# Altium PCB COND.PcbDoc
Units mil, origin at the board's own origin, x right, y up, seen from the top; angles counter-clockwise.
Board outline 1299.21 x 3180.91 mil, 2 copper layers (Top Layer, Bottom Layer), stack 12.8 mil thick; 123 components, 74 nets, 370 pads, 114 vias.
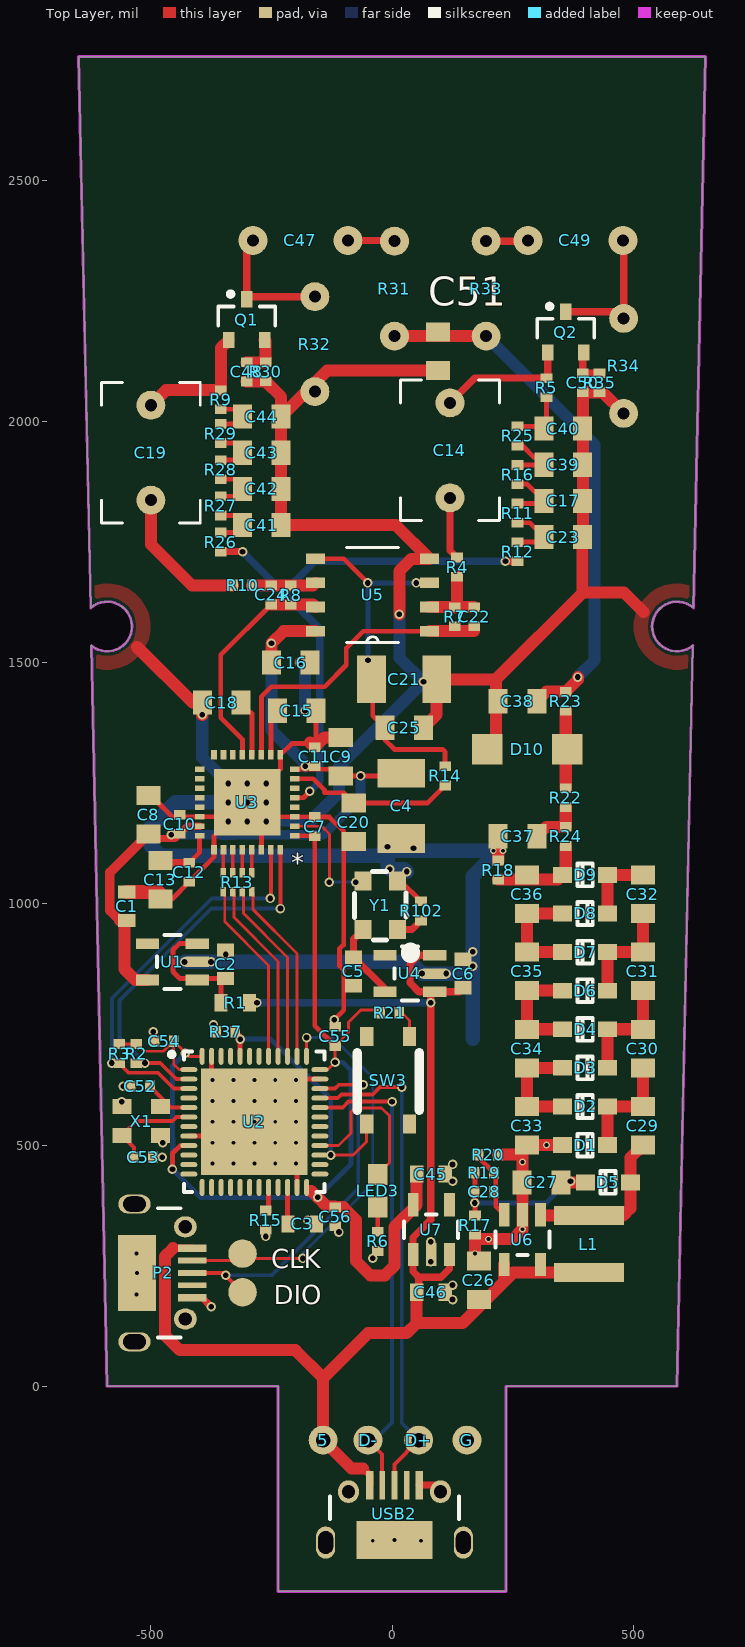
[diagram p0: Top Layer view]
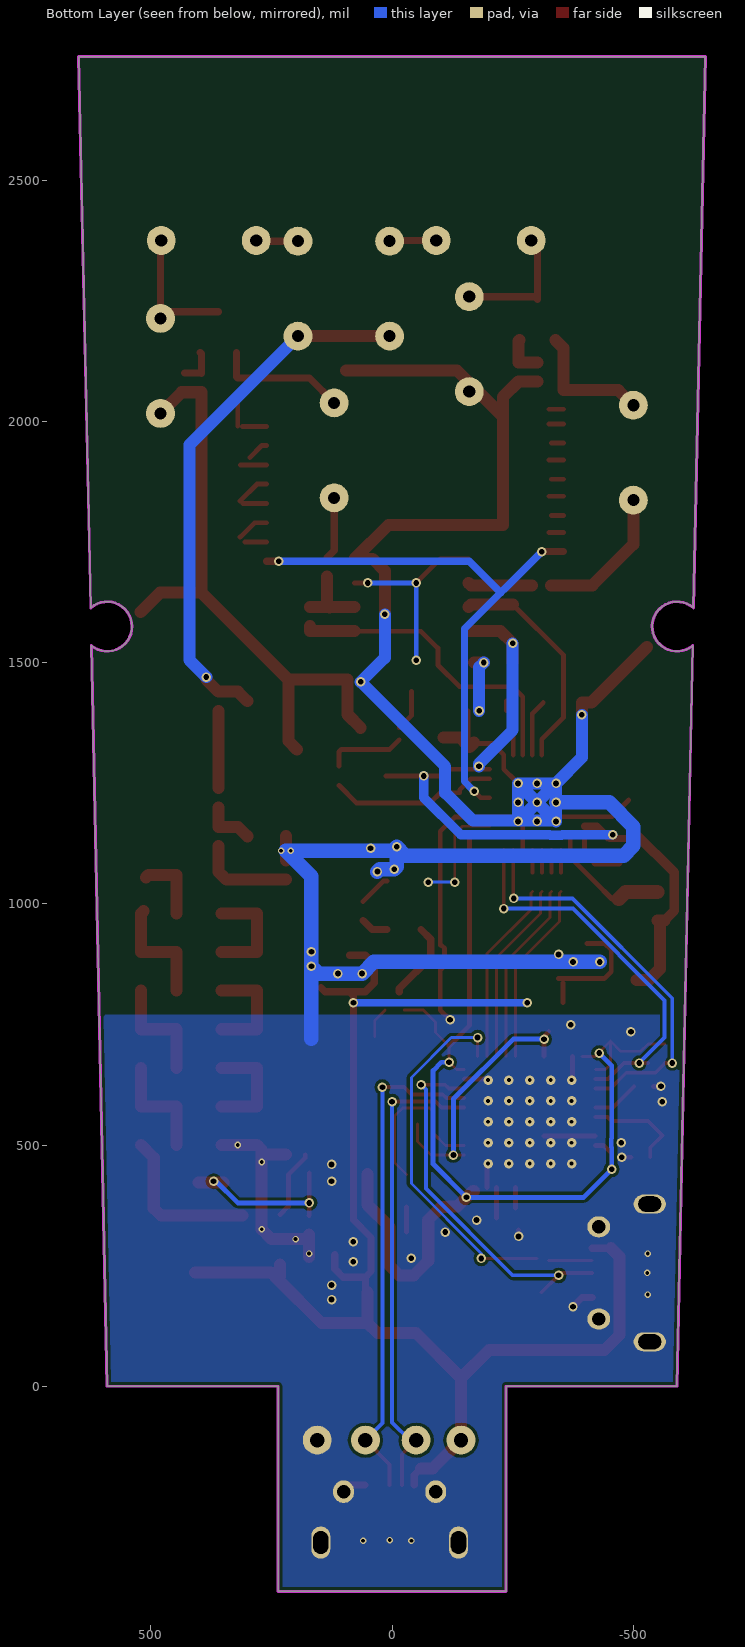
[diagram p1: Bottom Layer view, seen from below]

## Layer stack, top to bottom
Top Solder: solder mask 0.4, Solder Resist, Dk 3.5
Top Layer: signal copper 1.4
Dielectric 1: core 10, FR-4, Dk 4.2
Bottom Layer: signal copper 1.4
Bottom Solder: solder mask 0.4, Solder Resist, Dk 3.5

## Board outline
-590.55,0 -623.18,1535.05 ccw(c-590.55,1574.8) -624.5,1613.44 -649.61,2755.91 649.61,2755.91 624.5,1613.44 ccw(c590.55,1574.8) 623.53,1535.34 623.18,1535.05 590.55,0 236.22,0 236.22,-425 -236.22,-425 -236.22,0

## Design rules (kind name [scope] priority, off if disabled: settings)
Clearance Clearance_1 [(InNamedPolygon('Bottom Layer-No Net')) vs Not InNet('GND')] p1: gap=15 ignorepadtopadclearanceinfootprint=FALSE except(0: Arc-Hole Track-Hole SMDPad-Hole THPad-Hole Via-Hole Fill-Hole Poly-Hole Region-Hole Text-Hole)
Clearance [All] p2: gap=6 ignorepadtopadclearanceinfootprint=FALSE except(0: Arc-Hole Track-Hole SMDPad-Hole THPad-Hole Via-Hole Fill-Hole Poly-Hole Region-Hole Text-Hole)
DiffPairsRouting [All] p1: maxlimit=10 minlimit=10 mostfreqgap=10 toplayer_minwidth=5.98 toplayer_maxwidth=15 toplayer_prefwidth=15 bottomlayer_minwidth=5.98 bottomlayer_maxwidth=15 bottomlayer_prefwidth=15 maxuncoupledlength=500
HoleSize [All] p1: absolutevalues=TRUE maxlimit=120 minlimit=1 maxpercent=80.000 minpercent=20.000
MinimumSolderMaskSliver [All] p1 off: minsoldermaskwidth=10
PlaneClearance [All] p1: clearance=10
PlaneConnect [All] p1: planeconnectstyle=Direct reliefexpansion=20 reliefentries=4 reliefconductorwidth=10 reliefairgap=10
PolygonConnect [All] p1: connectstyle=Direct reliefconductorwidth=10 reliefentries=4 polygonreliefangle="90 Angle" airgapwidth=10
RoomDefinition POL&JFET [InComponentClass('POL&JFET')] p1 off: confinementstyle=ConfineIn formatcopy=TRUE lockcomponents=FALSE outline 702.51,-726.84 6873.76,-726.84 6873.76,-342.99 702.51,-342.99
RoomDefinition audio [InComponentClass('audio')] p2 off: confinementstyle=ConfineIn formatcopy=TRUE lockcomponents=FALSE outline -3313.23,257.41 -2801.42,257.41 -2801.42,641.26 -3313.23,641.26
RoomDefinition power [InComponentClass('power')] p3 off: confinementstyle=ConfineIn formatcopy=TRUE lockcomponents=FALSE outline -3313.23,975.91 -2220.71,975.91 -2220.71,1261.34 -3313.23,1261.34
RoomDefinition MCU [InComponentClass('MCU')] p4 off: confinementstyle=ConfineIn formatcopy=TRUE lockcomponents=FALSE outline -2820.94,287.18 -475.94,287.18 -475.94,527.18 -2820.94,527.18
RoutingVias [All] p1: holewidth=12 width=20 viastyle="Through Hole" minholewidth=11.81 minwidth=19.68 maxholewidth=28 maxwidth=50
SilkToBoardRegionClearance [All] p1 off:
SilkToSilkClearance [All] p1 off: silktosilkclearance=10
SilkToSolderMaskClearance [IsPad] p1 off: minsilkscreentomaskgap=10 clearancetoexposedcopper=TRUE
SolderMaskExpansion [All] p1: expansion=4
Width [All] p1: maxlimit=60 minlimit=6 preferedwidth=6
22 further rules are at their usual default settings.

## Classes and differential pairs
component class POL&JFET: C26 C27 C28 C29 C30 C31 C32 C33 C34 C35 C36 C37 C38 C47 C48 C49 C50 C51 D1 D2 D3 D4 D5 D6 D7 D8 D9 D10 L1 Q1 Q2 R17 R18 R19 R20 R22 R23 R24 R30 R31 R32 R33 R34 R35 U6
component class power: C1 C2 C4 C5 C6 C45 C46 R1 U1 U4 U7
component class MCU: 5 C3 C52 C53 C54 C55 C56 D+ D- G LED3 P2 R6 R13 R15 R21 R37 SW3 U2 USB2 X1
component class audio: C7 C8 C9 C10 C11 C12 C13 C14 C15 C16 C17 C18 C19 C20 C21 C22 C23 C24 C25 C39 C40 C41 C42 C43 C44 R2 R3 R4 R5 R7 R8 R9 R10 R11 R12 R14 R16 R25 R26 R27 R28 R29 R102 U3 U5 Y1

## Components (designator, comment, footprint, x,y, rotation, side; value= is the part's Value field where it differs from the comment)
5 "TestPad" TestPad -142.86,-111.6 r90 top
C1 "4.7uF" 0603L -550,995 r270 top
C2 "4.7uF" 0603L -345.14,874.6 r270 top
C3 "Cap" 0603L -186.14,336.6 r180 top value=4.7uF
C4 "220uF,Tan" 1210 18.6,1203.14 r90 top
C5 "4.7uF" 0603L -80,860 r90 top
C6 "4.7uF" 0603L 147.14,855.4 r270 top
C7 "0.1uF" 0402 -160.4,1160.14 r270 top
C8 "4.7uF" 0805 -505,1185 r270 top
C9 "4.7uF" 0805 -106.4,1305.14 r270 top
C10 "0.1uF" 0402 -440.4,1165.14 r270 top
C11 "0.1uF" 0402 -160.4,1305.14 r270 top
C12 "0.1uF" 0402 -420.4,1065.14 r90 top
C13 "4.7uF" 0805 -480,1050 r90 top
C14 "10uF" CL21-5mm-1F 120,1940 r90 top
C15 "10uF" 0805 -197.4,1400.14 r0 top
C16 "4.7uF" 0805 -210,1500 r180 top
C17 "4.7uF" 0805 355,1835 r180 top
C18 "10uF" 0805 -353.4,1417.14 r0 top
C19 "10uF" CL21-5mm-1F -500,1935 r90 top
C20 "4.7uF" 0805 -79.4,1169.14 r90 top
C21 "200uF" 1210 25,1465 r180 top
C22 "NC" 0402 170,1595 r90 top
C23 "4.7uF" 0805 355,1760 r180 top
C24 "100k" 0402 -250.4,1640.14 r90 top
C25 "4.7uF" 0805 25,1365 r180 top
C26 "2.2uF" 0805 180,220 r270 top
C27 "2.2uF" 0805 309.68,422.52 r0 top
C28 "470pf" 0402 191.57,402.83 r180 top
C29 "2.2uF" 0805 520,540 r90 top
C30 "2.2uF" 0805 520,700 r90 top
C31 "2.2uF" 0805 520,860 r90 top
C32 "2.2uF" 0805 520,1020 r90 top
C33 "2.2uF" 0805 280,540 r90 top
C34 "2.2uF" 0805 280,700 r90 top
C35 "2.2uF" 0805 280,860 r90 top
C36 "2.2uF" 0805 280,1020 r90 top
C37 "2.2uF" 0805 260,1140 r0 top
C38 "2.2uF" 0805 260,1420 r0 top
C39 "4.7uF" 0805 355,1910 r180 top
C40 "4.7uF" 0805 355,1985 r180 top
C41 "4.7uF" 0805 -270,1785 r180 top
C42 "4.7uF" 0805 -270,1860 r180 top
C43 "4.7uF" 0805 -270,1935 r180 top
C44 "4.7uF" 0805 -270,2010 r180 top
C45 "4.7uF" 0603L 80.4,439.86 r180 top
C46 "4.7uF" 0603L 80.4,194.86 r180 top
C47 "470pF/1nF/2.2nF" CL21-5mm-1A -190,2375 r180 top
C48 "NC" 0402 -301.26,2102.48 r270 top
C49 "470pF/1nF/2.2nF" CL21-5mm-1A 380,2375 r0 top
C50 "NC" 0402 395,2080 r270 top
C51 "2.2uF" 0805 95,2145 r90 top
C52 "Cap" 0402 -521.68,621.68 r0 top value=20pF
C53 "Cap" 0402 -515.14,474.6 r180 top value=20pF
C54 "Cap" 0402 -472.46,715.43 r0 top value=0.1uF
C55 "Cap" 0402 -118.13,725.27 r270 top value=0.1uF
C56 "Cap" 0402 -118.13,351.25 r90 top value=0.1uF
D1 "Diode 1N4148" LC-SOD-323 400,500 r180 top
D2 "Diode 1N4148" LC-SOD-323 400,580 r0 top
D3 "Diode 1N4148" LC-SOD-323 400,660 r180 top
D4 "Diode 1N4148" LC-SOD-323 400,740 r0 top
D5 "Diode 1N4148" LC-SOD-323 447.48,422.52 r0 top
D6 "Diode 1N4148" LC-SOD-323 400,820 r180 top
D7 "Diode 1N4148" LC-SOD-323 400,900 r0 top
D8 "Diode 1N4148" LC-SOD-323 400,980 r180 top
D9 "Diode 1N4148" LC-SOD-323 400,1060 r0 top
D10 "D Zener" SMA 280,1320 r0 top
D+ "TestPad" TestPad 55.14,-111.6 r0 top
D- "TestPad" TestPad -49.86,-111.6 r0 top
G "TestPad" TestPad 155.14,-111.6 r90 top
L1 "Inductor Iron Dot" L4015 408.11,235.51 r90 top value=10uH
LED3 "LED0" 0603 -29.86,405.4 r270 top
P2 "SWD_MicroUSB" MICRO-YZX -645,235 r270 top
Q1 "JFET-N" SOT23_L -301.26,2210.75 r90 top
Q2 "JFET-N" SOT23_L 360,2185 r90 top
R1 "FB" 0603L -325,795 r0 top value=0Ohm
R2 "Res2" 0402 -530.14,689.6 r90 top value=10k
R3 "Res2" 0402 -565.14,689.6 r90 top value=10k
R4 "1k" 0402 134.6,1698.14 r270 top
R5 "NC" 0402 320,2070 r270 top
R6 "10k" 0402 -29.86,300.4 r270 top value=0Ohm
R7 "100k" 0402 130,1595 r270 top
R8 "NC" 0402 -210.4,1640.14 r270 top
R9 "NC" 0402 -355,2045 r270 top
R10 "1k" 0402 -310,1660 r0 top
R11 "250-300R" 0402 260,1810 r270 top
R12 "250-300R" 0402 260,1730 r270 top
R13 "Res*4" 0402X4 -320.4,1045.14 r270 top value=200Ohm
R14 "NC" 0402 110,1265 r90 top
R15 "10k" 0402 -262.14,344.6 r270 top value=0Ohm
R16 "250-300R" 0402 260,1890 r270 top
R17 "" 0402 171.89,333.94 r90 top value=10k
R18 "" 0402 220,1070 r270 top value=5M
R19 "" 0402 191.57,442.2 r180 top value=10k
R20 "" 0402 200,480 r180 top value=10k
R21 "1k" 0402 -5.14,774.6 r180 top value=0Ohm
R22 "" 0402 360,1220 r270 top value=100k
R23 "" 0402 360,1420 r270 top value=1M
R24 "" 0402 360,1140 r270 top value=100k
R25 "250-300R" 0402 260,1970 r270 top
R26 "250-300R" 0402 -355,1750 r270 top
R27 "250-300R" 0402 -355,1825 r270 top
R28 "250-300R" 0402 -355,1900 r270 top
R29 "250-300R" 0402 -355,1975 r270 top
R30 "" 0402 -261.89,2102.48 r90 top value=1k
R31 "" R-1G 5,2275 r270 top value=1G
R32 "" R-1G -160,2160 r90 top value=1G
R33 "" R-1G 195,2275 r270 top value=1G
R34 "" R-1G 480,2115 r90 top value=1G
R35 "" 0402 430,2080 r90 top value=1k
R37 "Res2" 0402 -344.51,735.11 r180 top value=10k
R102 "NC" 0402 60,985 r90 top
SW3 "SW-PB" SW3x4 -8.37,634.6 r90 top
U1 "LP5907" SOT23-5 -455.14,879.6 r90 top
U2 "STM32F401CCU6" STM-UFQFPN48_N -285.46,548.1 r0 top
U3 "ADAU1761" ADAU1761 -300.4,1210.14 r180 top
U4 "LP5907" SOT23-5 37.14,855.4 r90 top
U5 "OP-2" SO8 -40.4,1640.14 r180 top
U6 "LM27313XMF/NOPB" SOT23-5 270.31,304.41 r180 top value=Value
U7 "LP5907" SOT23-5 80.91,324.43 r0 top
USB2 "USB Micro Type B" MICRO-YZX 5,-435 r0 top
X1 "24.000 KHz 3.2x2.5mm 8-10pf" OSCILLATOR-2.5x2.0 -520.14,549.6 r180 top
Y1 "OSC_40M" TXC_7Q -24.6,996.86 r90 top

## Footprints (in the part's own frame and the unit in brackets; to place one, negate y for a bottom-side part, rotate by r counter-clockwise, add the part's x,y. Pads: shape width x height; smd on the part's side, far side on the other; paste and mask are expansions set on the pad)
0402 [mil] "0402-RES"
  rect 20x24 smd: 1(-19.68,0) 2(20,0)
0402X4 [mm]
  rect 0.5x0.28 smd: 1(-0.5,0.75) 2(-0.5,0.25) 3(-0.5,-0.25) 4(-0.5,-0.75) 5(0.5,-0.75) 6(0.5,-0.25) 7(0.5,0.25) 8(0.5,0.75)
0603 [mil] "0603-RES"
  rect 44x40 smd: 1(-33.46,0) 2(34,0)
  body extent -31,-16 31,16, height 31
0603L [mm]
  rect 0.7x0.9 smd: 1(-0.75,0) 2(0.75,0)
  body extent -0.8,-0.4 0.8,0.4, height 0.8
0805 [mil]
  rect 39.37x50 smd: 1(-40,0) 2(40,0)
  body extent -50,-30 50,30, height 31
1210 [mm]
  rect 1.52x2.5 smd: 1(-1.715,0) 2(1.715,0)
ADAU1761 [mm]
  rect 3.5x3.5 smd: 0(0,0)
  rect 0.5x0.3 smd: 1(-2.5,1.75) 2(-2.5,1.25) 3(-2.5,0.75) 4(-2.5,0.25) 5(-2.5,-0.25) 6(-2.5,-0.75) 7(-2.5,-1.25) 8(-2.5,-1.75) 17(2.5,-1.75) 18(2.5,-1.25) 19(2.5,-0.75) 20(2.5,-0.25) 21(2.5,0.25) 22(2.5,0.75) 23(2.5,1.25) 24(2.5,1.75)
  rect 0.3x0.5 smd: 9(-1.75,-2.5) 10(-1.25,-2.5) 11(-0.75,-2.5) 12(-0.25,-2.5) 13(0.25,-2.5) 14(0.75,-2.5) 15(1.25,-2.5) 16(1.75,-2.5) 25(1.75,2.5) 26(1.25,2.5) 27(0.75,2.5) 28(0.25,2.5) 29(-0.25,2.5) 30(-0.75,2.5) 31(-1.25,2.5) 32(-1.75,2.5)
  body extent -2.5,-2.5 2.5,2.5, height 0.8
CL21-5mm-1A [mil]
  round 60 hole 25: 1(-98.43,0) 2(98.43,0)
  body extent -142,-47 142,47, height 394
CL21-5mm-1F [mil]
  round 60 hole 25: 1(-98.43,0) 2(98.43,0)
  silkscreen extent -146,-102 146,102, body extent -142,-98 142,98, height 394
L4015 [mm]
  rect 1x3.7 smd: 1(0,0) 2(3,0)
LC-SOD-323 [mm]
  rect 1x0.83 smd: 1(1.18,0) 2(-1.18,0)
  silkscreen extent -0.4,-0.6 0.4,0.6, body extent -1.35,-0.62 1.35,0.63, height 1.1
MICRO-YZX [mm]
  rect 0.4x1.5 smd: 1(-1.3,5.85) 5(1.3,5.85)
  rect 0.3x1.5 smd: 2(-0.65,5.85) 3(0,5.85) 4(0.65,5.85)
  oval 1x1.7 hole 0.8 slot 1.2 at 90 deg: 5(-3.625,2.82) 5(3.625,2.82)
  oval 1.1x1.2 hole 0.7: 5(-2.425,5.5) 5(2.425,5.5)
  rect 4x2 smd: 5(0,2.95)
  silkscreen extent -3.4,4.05 3.4,5.25, body extent -4.02,0.33 3.98,5.93, height 2.6
OSCILLATOR-2.5x2.0 [mil] "OSCILLATOR-3.2X2.5"
  rect 39.37x31.5 smd: 1(-40,-30) 2(40,-30) 3(40,30) 4(-40,30)
  body extent -50,-40 50,40, height 35
R-1G [mil]
  round 60 hole 25: 1(-98.43,0) 2(98.43,0)
  body extent -142,-47 142,47, height 394
SMA [mm]
  rect 1.6x1.6 smd: 1(-2.1,0) 2(2.1,0)
  body extent -2.1,-1.3 2.1,1.3, height 2.3
SO8 [mm]
  rect 1x0.559 smd: 1(-3,1.905) 2(-3,0.635) 3(-3,-0.635) 4(-3,-1.905) 5(3,-1.905) 6(3,-0.635) 7(3,0.635) 8(3,1.905)
  silkscreen extent -1.37,-2.5 1.37,2.5, body extent -3,-2.45 3,2.45, height 1.63
SOT23-5 [mil] "SOT23-5"
  rect 22x48 smd: 1(-37.4,-51.19) 2(0,-51.19) 3(38,-51.19) 4(38,52) 5(-37.4,52)
  silkscreen extent -56,-17 56,32
SOT23_L [mm] "SOT23, 3-Leads, Body 2.9x1.3mm, Pitch 0.95mm, Lead Span 2.3mm - Reverse Pinning, IPC High Density"
  rect 0.85x0.6 smd: 1(1.075,0) 2(-1.075,-0.95) 3(-1.075,0.95)
  silkscreen extent -0.3,-1.5 1.47,1.5, body extent -0.7,-1.5 0.7,1.5, height 1.1
STM-UFQFPN48_N [mm] "QFN, 48-Leads, Body 7.1x7.1mm, Pitch 0.5mm, Thermal Pad 5.6x5.6mm, IPC Medium Density"
  oval 0.9x0.25 smd: 1(-3.45,2.75) 2(-3.45,2.25) 3(-3.45,1.75) 4(-3.45,1.25) 5(-3.45,0.75) 6(-3.45,0.25) 7(-3.45,-0.25) 8(-3.45,-0.75) 9(-3.45,-1.25) 10(-3.45,-1.75) 11(-3.45,-2.25) 12(-3.45,-2.75) 25(3.45,-2.75) 26(3.45,-2.25) 27(3.45,-1.75) 28(3.45,-1.25) 29(3.45,-0.75) 30(3.45,-0.25) 31(3.45,0.25) 32(3.45,0.75) 33(3.45,1.25) 34(3.45,1.75) 35(3.45,2.25) 36(3.45,2.75)
  oval 0.25x0.9 smd: 13(-2.75,-3.45) 14(-2.25,-3.45) 15(-1.75,-3.45) 16(-1.25,-3.45) 17(-0.75,-3.45) 18(-0.25,-3.45) 19(0.25,-3.45) 20(0.75,-3.45) 21(1.25,-3.45) 22(1.75,-3.45) 23(2.25,-3.45) 24(2.75,-3.45) 37(2.75,3.45) 38(2.25,3.45) 39(1.75,3.45) 40(1.25,3.45) 41(0.75,3.45) 42(0.25,3.45) 43(-0.25,3.45) 44(-0.75,3.45) 45(-1.25,3.45) 46(-1.75,3.45) 47(-2.25,3.45) 48(-2.75,3.45)
  rect 5.6x5.6 smd: 49(0,0)
  silkscreen extent -4.47,-3.7 3.7,3.7, body extent -3.55,-3.55 3.55,3.55, height 0.6
SW3x4 [mm]
  rect 1x0.7 smd: 1(-2.3,1.125) 2(2.3,-1.125) 3(2.3,1.125) 4(-2.3,-1.125)
  silkscreen extent -1.58,-1.65 1.45,1.63, body extent -2,-1.5 2,1.5, height 2.6
TestPad [mil]
  round 60 hole 30: 1(0,0)
TXC_7Q [mm]
  rect 1x0.9 smd: 1(-1.275,-0.9) 2(1.275,-0.9) 3(1.275,0.9) 4(-1.275,0.9)
  silkscreen extent -2.52,-1.6 1.78,1.35

## Part data
C1 C2 C4 C5 C6 C7 C8 C9 C10 C11 C12 C13 C14 C15 C16 C17 C18 C19 C20 C21 C22 C23 C24 C25 C39 C40 C41 C42 C43 C44 C45 C46 C47 C48 C49 C50: library part Cap, "Capacitor", LatestRevisionDate=17-Jul-2002, LatestRevisionNote="Re-released for DXP Platform.", PackageDescription="Radial Cap, Thru-Hole; 2 Leads; 0.3 in Pin Spacing", PackageReference=RAD-0.3, Published=8-Jun-2000, Publisher="Altium Limited"
C3 C52 C53 C54 C55 C56: "Capacitor", LatestRevisionDate=17-Jul-2002, LatestRevisionNote="Re-released for DXP Platform.", PackageDescription="Radial Cap, Thru-Hole; 2 Leads; 0.3 in Pin Spacing", PackageReference=RAD-0.3, Published=8-Jun-2000, Publisher="Altium Limited"
C26 C27 C28 C29 C30 C31 C32 C33 C34 C35 C36 C37 C38 C51: library part CAP0402-CAP, "<b>Capacitor</b> / Standard 0603 ceramic capacitor, and 0.1\" leaded capacitor.", PARTNO=CC0402ZRY5V7BB104
D1 D2 D3 D4 D5 D6 D7 D8 D9: "High Conductance Fast Diode", Code_JEDEC=DO-204-AH, ComponentLink1Description="Manufacturer Link", ComponentLink1URL=http://www.fairchildsemi.com/, ComponentLink2Description=Datasheet, ComponentLink2URL=http://www.fairchildsemi.com/ds/1N%2F1N4148.pdf, DatasheetVersion=1997, LatestRevisionDate=17-Jul-2002, LatestRevisionNote="Re-released for DXP Platform.", PackageDescription="Diode, Axial; Body 3.8 x 1.9 mm (LxDia. max), Lead Dia. 0.53 mm (max)", PackageReference=DO-35, Published=8-Jun-2000, Publisher="Altium Limited"
D10: "Zener Diode", LatestRevisionDate=17-Jul-2002, LatestRevisionNote="Re-released for DXP Platform.", PackageDescription="Diode, Thru-Hole; 2 Leads; 0.7 in Pin Spacing", PackageReference=DIODE-0.7, Published=8-Jun-2000, Publisher="Altium Limited"
L1: "Magnetic-Core Inductor with Winding Polarity Marking", LatestRevisionDate=17-Jul-2002, LatestRevisionNote="Re-released for DXP Platform.", PackageDescription="Diode; 2 Leads", PackageReference=DIODE_SMC, Published=24-Mar-1999, Publisher="Altium Limited"
LED3: "Typical INFRARED GaAs LED", LatestRevisionDate=08-Jul-2005, LatestRevisionNote="Mech Layer 1 removed.", PackageDescription="LED; 2 Leads", PackageReference=LED-0, Published=8-Jun-2000, Publisher="Altium Limited"
P2: "Connector SMD USB Micro Type B middle mount", Manufacturer 1="Molex Inc", Package / Case=SMD, Supplier Part Number 1=WM17142CT-ND, SCDType=undef, Supplier 1=Digi-Key
Q1 Q2: "N-Channel JFET", Code_JEDEC=TO-254-AA, LatestRevisionDate=17-Jul-2002, LatestRevisionNote="Re-released for DXP Platform.", PackageReference=TO-254-AA, Published=8-Jun-2000, Publisher="Altium Limited"
R1 R4 R5 R6 R7 R8 R9 R10 R11 R12 R14 R15 R16 R17 R18 R19 R20 R21 R22 R23 R24 R25 R26 R27 R28 R29 R30 R31 R32 R33 R34 R35 R102: library part Res2, "Resistor", LatestRevisionDate=17-Jul-2002, LatestRevisionNote="Re-released for DXP Platform.", PackageDescription="Axial Device, Thru-Hole; 2 Leads; 0.4 in Pin Spacing", PackageReference=AXIAL-0.4, Published=8-Jun-2000, Publisher="Altium Limited"
R2 R3 R13 R37: "Resistor", LatestRevisionDate=17-Jul-2002, LatestRevisionNote="Re-released for DXP Platform.", PackageDescription="Axial Device, Thru-Hole; 2 Leads; 0.4 in Pin Spacing", PackageReference=AXIAL-0.4, Published=8-Jun-2000, Publisher="Altium Limited"
SW3: "Switch", LatestRevisionDate=17-Jul-2002, LatestRevisionNote="Re-released for DXP Platform.", PackageDescription="Switch; 2 Leads", PackageReference=SPST-2, Published=24-Mar-1999, Publisher="Altium Limited"
U2: "ARM Cortex-M4 32-bit MCU+FPU, 105 DMIPS, 256 kB Flash, 64 kB Internal RAM, 36 I/Os, 48-pin UFQFPN, -40 to 85 degC, Tray", I/Os (High Current)=36, Manufacturer=STMicroelectronics, Operating Frequency(F) (Processor speed) (MHz)=84, Supplier Part Number 1=19X6217, Supply Voltage(Vcc) max (V)=3.6, Supply Voltage(Vcc) min (V)=1.8, ComponentLink1Description="Manufacturer URL", ComponentLink1URL=http://www.st.com/web/en/home.html, ComponentLink2Description=Datasheet, ComponentLink2URL=http://www.st.com/st-web-ui/static/active/en/resource/technical/document/data_brief/DM00071938.pdf, ComponentLink3Description="Package Specification", ComponentLink3URL=http://www.st.com/st-web-ui/static/active/en/resource/technical/document/data_brief/DM00071938.pdf, Core="ARM Cortex-M4", DatasheetVersion="Rev. 1", FLASH Size (Prog) (kB)=256, Internal RAM Size (kB)=64, Mounting Technology="Surface Mount", PackageDescription="48-Pin Ultra Thin Fine Pitch Quad Flat No-Lead, 7 x 7 x 0.6 mm Body, 0.5 mm Pitch, Exposed Pad", PackageReference=UFQFPN48, PackageVersion="Rev. 1, 04/2013", Packing=Tray, PartNumber=STM32F401CCU6, Supplier 1=Newark, Supplier 2=Mouser, Supplier Part Number 2=511-STM32F401CCU6
U6: "Imported", Manufacturer="Texas Instruments", CompType=IC, MountType=SMT, PackageReference=DBV0005A, PartNumber=LM27313XMF/NOPB, PIN_COUNT=5, RefDes=RefDes, RoHS=Y, Type=DEV
USB2: library part USB_Micro_TypeB, "Connector SMD USB Micro Type B middle mount", Manufacturer 1="Molex Inc", Manufacturer Part Number 1=47491-0001, Package / Case=SMD, Supplier Part Number 1=WM17142CT-ND, SCDType=undef, Supplier 1=Digi-Key
X1: library part OSCILLATOR-3.2X2.5, "Crystal Oscillator in 3.2x2.5 SMD"

## Free pads (board coordinates)
  round 59.06 smd: 0(-310,275) 8(-310,195)

## Via types
v1: diameter 19.68, hole 11.81, Top Layer to Bottom Layer, 76 vias
v2: diameter 19.68, hole 7.87, Top Layer to Bottom Layer, 25 vias
v3: diameter 13.78, hole 7.87, Top Layer to Bottom Layer, 13 vias

## Nets (pads, with @x,y where several pads share a name; then routed paths per layer and width w, separated by ;. In a path a pad name is that pad's centre, name@x,y a point inside that pad or via, vN(x,y) a via of type N, cw(c..) or ccw(c..) an arc to the next point about the centre after c; other vN are vias at no path point)
3.3A: C1.2 C4.2 C8.2 C9.2 C10.2 C11.2 C16.2 U1.5 U3.8 U3.23 U5.8 | length 1583.2
  Top Layer w10: U3.8 C9.2@-124.3,1279.04 ; C9.2 v1(-65.4,1265.14) C4.2@13.08,1265.14
  Top Layer w15: C8.2@-490.4,1135.14 -450.4,1135.14 C10.2 -424.61,1160.93 U3.23
  Top Layer w20: C1.2@-564.26,965.47 -585,986.22 -585,1065 C8.2
  Top Layer w25: C1.2@-564.26,965.47 C1.2 ; C1.2@-555,960.47 -555,865 -532.2,842.2 U1.5 ; C16.2 v1(-250,1540) -224.86,1565.14 U5.8
  Bottom Layer w20: v1(-457.4,1143.14) -352.45,1143.14 -351.58,1142.27 -327.97,1142.27 -327.1,1143.14 -142.4,1143.14 -65.4,1220.14 v1(-65.4,1265.14)
  Bottom Layer w25: v1(-250,1540) -250,1360 -180,1290 v1(-180,1285)
3.3Clock: C5.2 U4.5 Y1.4 | length 163.9
  Top Layer w15: Y1.4 -80,926.69 C5.2 -14.86,824.39 U4.5
3.3D: C7.2 C45.2 C54.2 C55.2 C56.2 R2.2 R3.2 R21.2 U2.1 U2.9 U2.24 U2.36 U2.48 U3.1 U7.5 | length 2538.3
  Top Layer w6: R3.2 R2.2 -514.97,694.43 -473.46,694.43 C54.2 ; U2.1 -441.91,656.37 -452.46,666.92 C54.2 ; U2.48 -420.97,683.93 C54.2 ; U2.36 -133.37,656.37 v1(-118.13,671.61) C55.2 -90.14,733.26 -90.14,754.6 -65.14,779.6 R21.2@-25.14,779.6
  Top Layer w10: v1(-455.14,449.6) -455.14,482.6 -438.85,498.89 U2.9 ; U3.1 C7.2@-161.5,1141.24 ; C7.2 -160.4,747.54 C55.2 ; U7.5 C45.2@43.51,432.5
  Top Layer w25: -170,405 -167.54,405 v1(-154.14,391.6) -135.36,372.82 -118.13,372.82 C56.2 -101.25,371.25 -75,345 -75,260 -45,230 -15,230 5,250 5,330 50.87,375.87 C45.2
  Bottom Layer w10: v1(-429.14,690.6) -455.14,664.6 -455.14,514.07 -454.3,513.23 -454.3,495.97 -455.14,495.12 v1(-455.14,449.6) -397.14,391.6 v1(-154.14,391.6) -85,460.74 -85,654.46 -102.15,671.61 v1(-118.13,671.61)
5V: 5.1 C6.2 C26.2 C46.2 L1.1 P2.1 R1.2 U4.1 U4.3 U6.4 U6.5 U7.1 U7.3 USB2.1 | length 2926.5
  Top Layer w15: -453.82,286.18 P2.1 ; -60,-170 -46.18,-183.82 USB2.1 ; C46.2@55.18,199.17 55.18,226.07 ; U4.3 55.14,893.4 37.14,875.4 37.14,836.4 55.54,818 U4.1 ; U7.3 118.91,243.37 101.62,226.07 55.18,226.07 ; C6.2 139.27,818 U4.1 ; 55.18,226.07 43.51,237.75 U7.1 43.51,308.51 80,345 v1(80,795) 80,809.67 U4.1
  Top Layer w25: -453.82,286.18 -470.99,269.01 -470.99,105.99 -440,75 -200.72,75 -142.86,17.14 ; -60,-170 -84.46,-170 5.1 -142.86,17.14 ; C46.2 50.87,130.87 ; U6.4 232.31,227.68 237.5,222.5 ; L1.1 250.51,235.51 237.5,222.5 ; -142.86,17.14 -50,110 30,110 50.87,130.87 ; 50.87,130.87 145.87,130.87 237.5,222.5
  Bottom Layer w15: v1(-280,795) v1(80,795)
120V: C38.2 C51.2 R23.1 R31.2 R33.2 | length 1113.1
  Top Layer w25: R31.2 R33.2 ; C38.2 319.68,1439.68 R23.1 385,1464.68 v1(385,1470)
  Bottom Layer w25: R33.2 420,1951.57 420,1505 v1(385,1470)
BIASA: C40.2 R5.2 R25.1 | length 110.3
  Top Layer w10: R25.1 C40.2@310.31,1989.68 ; C40.2@320,1990 R5.2
BIASB: C44.2 R9.2 R29.1 | length 59.7
  Top Layer w10: R29.1 C44.2@-325.32,1994.68 ; R9.2 C44.2@-325,2025
CM: C21.2 C25.2 R14.2 U5.3 U5.5 | length 667.8
  Top Layer w10: U5.5 -100.14,1715.14 v1(-50.14,1665.14) ; C21.2@-40,1440 -40,1390 C25.2 ; C25.2@-15,1340 5,1320 105,1320 110,1315 R14.2 ; v1(50.14,1665.14) U5.3
  Bottom Layer w10: v1(-50,1505) -50.14,1505.14 v1(-50.14,1665.14) v1(50.14,1665.14)
GND: C1.1 C2.1 C3.1 C4.1 C5.1 C6.1 C7.1 C8.1 C9.1 C10.1 C11.1 C12.1 C13.1 C15.2 C16.1 C17.1 C18.1 C20.1 C21.1 C23.1 C25.1 C26.1 C27.1 C33.1 C37.1 C38.1 C39.1 C40.1 C41.1 C42.1 C43.1 C44.1 C45.1 C46.1 C48.2 C50.2 C51.1 C52.1 C53.1 C54.1 C55.1 C56.1 D1.1 D10.1 G.1 P2.5 R6.2 R15.2 R17.1 R18.1 R20.1 R30.1 R32.1 R34.1 R35.1 R37.2 R102.2 U1.2 U2.8 U2.23 U2.35 U2.47 U2.49 U3.0 U3.3 U3.9 U3.22 U3.25 U3.30 U4.2 U5.4 U6.2 U7.2 USB2.5 X1.2 X1.4 Y1.2 | length 8601.5
  Top Layer w10: v1(-557.23,621.68) C52.1 ; C53.1 v1(-476.14,474.6) ; C8.1@-490.4,1215.14 -455.87,1180.61 U3.22 U3.0@-329.93,1180.61 ; C13.1 -470,1010 -455.86,1010 C12.1 -369.3,1096.56 U3.25 U3.0@-369.3,1141.24 ; U2.8 U2.49@-314.98,518.57 ; U2.49@-374.04,636.68 U2.47 ; U3.30 U3.0@-270.87,1180.61 ; v1(-262.14,310.6) R15.2 ; U3.0@-254.87,1180.61 U3.3 -161.19,1180.61 C7.1 -129.83,1179.83 -100,1150 -100,914.31 -102.27,914.31 -108.72,907.86 -108.72,871.19 -102.27,864.75 -100,864.75 -100,779.74 v1(-120.14,759.6) ; U3.0@-254.87,1210.14 -254.87,1255.67 -231.5,1279.04 U3.9 -207.93,1332.14 -176.4,1332.14 ; U2.23 U2.49@-196.87,459.52 ; U2.49@-196.87,636.68 U2.35 ; C11.1 -157.4,1327.83 C15.2 ; Y1.2 17.94,1047.06 R102.2
  Top Layer w15: P2.5@-414.69,183.82 -393.82,183.82 v1(-375,165) ; USB2.5@56.18,-204.68 USB2.5@86.69,-204.68
  Top Layer w25: -528.53,1532.47 -413.2,1417.14 C18.1 v1(-393.4,1391.6) ; C48.2 -262.2,2082.48 R30.1 -230,2050.91 C44.1 ; v1(-190,1500) C16.1 ; C11.1@-170,1334.43 C11.1 ; C11.1@-157.4,1327.83 -140.09,1345.14 C9.1 ; v1(15,1600) 15,1690 40.14,1715.14 U5.4 7.85,1785 C41.1 C42.1 C43.1 C44.1 ; C25.1 92.52,1392.52 C21.1 215,1465 ; C51.1 -135,2105 C44.1 ; C26.1@171.89,268.11 R17.1 ; R17.1@180,305 250,305 v3(270.31,325.32) U6.2 270.31,490.32 C33.1 D1.1 ; D10.1 215,1337.68 215,1465 ; R20.1 260,480 ; R18.1 C37.1 ; R34.1 436.26,2060.32 R35.1 395.31,2060.32 395.31,1760.32 C23.1 395,1645 ; 521.43,1604.56 480.98,1645 395,1645 ; 215,1465 395,1645
  Top Layer w30: C1.1 -484.53,1024.53 C13.1@-470,1010
  Bottom Layer w25: v1(-393.4,1391.6) -393.4,1303.14 v1(-339.77,1249.51) ; v1(-339.77,1170.77) v1(-261.03,1249.51) ; v1(-190,1500) -180.4,1490.4 v1(-180.4,1400.14) ; v1(15,1600) 15,1510 v1(65,1460) -110,1285 -110,1230 -167.36,1172.64 v1@-261.03,1172.64 ; v1(-339.77,1249.51) v1(-300.4,1210.14) v1@-262.9,1172.64 ; v1(-339.77,1249.51) v1(-339.77,1210.14) -339.77,1172.64 v1@-262.9,1172.64 ; v1(-339.77,1249.51) v1(-300.4,1249.51) v1(-261.03,1249.51) ; v1@-262.9,1172.64 v1@-261.03,1172.64 ; v1@-261.03,1172.64 v1(-261.03,1210.14) v1(-261.03,1249.51)
  Bottom Layer w30: v1(-430.14,879.6) v1(-375.14,879.6) 37.94,879.6 v1(62.14,855.4) v1(112.14,855.4) 152.14,855.4 v1(167.14,870.4) ; v1(-339.77,1210.14) -449.86,1210.14 -500,1160 -500,1120 -480,1100 -27.54,1100 v1(-9.4,1118.14) ; v1(30.4,1066.86) 25.4,1071.86 v1(-4.6,1071.86) -9.4,1076.66 v1(-9.4,1118.14) ; 167.14,720 v1(167.14,870.4) ; v1(-9.4,1118.14) -1.26,1110 v3(210,1110) 220,1110 167.14,1057.14 v1(167.14,900.4) v1(167.14,870.4)
  other v1: 125.4,179.86 125.4,209.86 80.4,257.86 -39.86,265.4 80.4,299.86 -110.14,319.6 -175.14,344.6 125.4,424.86 125.4,459.86 -475.14,504.6 -560.14,589.6 -495.14,734.6 -370.14,749.6 -345,895 44.6,1115.14 -300.4,1170.77 -261.03,1170.77
  other v2: -372.07,461.49 -328.76,461.49 -285.46,461.49 -242.15,461.49 -198.84,461.49 -372.07,504.8 -328.76,504.8 -285.46,504.8 -242.15,504.8 -198.84,504.8 -372.07,548.1 -328.76,548.1 -285.46,548.1 -242.15,548.1 -198.84,548.1 -372.07,591.41 -328.76,591.41 -285.46,591.41 -242.15,591.41 -198.84,591.41 -372.07,634.72 -328.76,634.72 -285.46,634.72 -242.15,634.72 -198.84,634.72
  other v3: -40,-320 60,-320 5,-318.86 -530,190 -528.86,235 -530,275 171.89,275 200,305 270.31,465 320,500 230,1110
KEY: R37.1 SW3.1 U2.27 U2.44 | length 556.2
  Top Layer w6: U2.27 v1(-127.16,479.2) -80.54,479.2 -52.66,507.08 SW3.1
  Top Layer w10: R37.1 -314.98,725.27 v1(-314.98,719.6) U2.44
  Bottom Layer w10: v1(-314.98,719.6) -251.35,719.6 -127.16,595.4 v1(-127.16,479.2)
MICBIAS: R12.2 R26.2 U3.5 | length 1165.5
  Top Layer w10: U3.5 -183.56,1219.98 v1(-170.4,1233.14)
  Top Layer w15: R26.2 v1(-310,1730) ; v1(235,1710) R12.2
  Bottom Layer w15: v1(-310,1730) -150,1570 -150,1253.54 -150.06,1253.48 ; -225,1645 -160,1710 v1(235,1710) ; v1(-170.4,1233.14) v1@-163.74,1239.8 ; v1@-163.74,1239.81 -150.07,1253.48
NetC2_2: C2.2 R1.1 U1.1 U1.3 | length 256.3
  Top Layer w10: U1.3 -441.14,917.6 -454.14,904.6 -454.14,859.6 -439.61,845.07 C2.2 ; R1.1 C2.2@-354.53,835.68
NetC3_2: C3.2 U2.22 | length 63.7
  Top Layer w10: C3.2@-216.56,348.6 U2.22
NetC12_2: C12.2 C13.2 U3.24 | length 115
  Top Layer w10: C12.2 -398.83,1106.72 U3.24
  Top Layer w15: C13.2@-470.4,1085.14 C12.2
NetC14_1: C14.1 R4.1 | length 129.8
  Top Layer w15: C14.1 120,1732.43 R4.1
NetC14_2: C14.2 Q2.3 R5.1 | length 275.3
  Top Layer w15: C14.2 171.26,2089.68 R5.1 322.6,2092.28 Q2.3
NetC15_1: C15.1 U3.10 | length 102.8
  Top Layer w10: U3.10 C15.1@-251.19,1391.35 ; C15.1 C15.1@-237.4,1420.14
NetC17_2: C17.2 R11.1 R16.2 | length 119.2
  Top Layer w10: R11.1 C17.2@309.68,1829.68 ; R16.2 280,1870 C17.2
NetC18_2: C18.2 U3.12 | length 118
  Top Layer w10: C18.2 -290.56,1394.3 U3.12
NetC19_1: C19.1 R10.1 | length 297.1
  Top Layer w25: C19.1 -500,1745 -415,1660 R10.1
NetC19_2: C19.2 Q1.3 R9.1 | length 268.5
  Top Layer w25: C19.2 -468.74,2064.68 R9.1 -355,2152.09 Q1.3
NetC20_2: C20.2 R14.1 U3.7 | length 351.3
  Top Layer w10: U3.7 -163.61,1259.35 -140.4,1236.14 -140.4,1230.14 -100.4,1230.14 C20.2 73.83,1209.14 R14.1
NetC22_1: C22.1 R7.2 U3.11 U5.1 | length 648.4
  Top Layer w10: U3.11 -270.87,1429.13 -250,1450 -140,1450 -95,1495 -95,1530 -59.86,1565.14 U5.1
  Top Layer w25: U5.1 169.86,1565.14 170,1565.28 C22.1
NetC22_2: C22.2 R4.2 R7.1 U5.2 | length 157.5
  Top Layer w25: U5.2 R7.1@130.46,1615.14 ; R7.1 R7.1@130.46,1615.14 ; R4.2 134.6,1619.28 R7.1@130.46,1615.14 ; C22.2@169.86,1615.14 R7.1@130.46,1615.14
NetC23_2: C23.2 R11.2 R12.1 | length 112.1
  Top Layer w10: R12.1 C23.2@304.68,1749.68 ; R11.2 285,1790 C23.2
NetC24_1: C24.1 R8.2 U3.13 U5.7 | length 467.8
  Top Layer w10: U3.13 -310.24,1340.98 -355,1385.74 -355,1515.86 C24.1
  Top Layer w25: C24.1 -163.83,1620.46 U5.7
NetC24_2: C24.2 R8.1 R10.2 U5.6 | length 133.6
  Top Layer w25: R10.2 -163.65,1660 U5.6
NetC27_2: C27.2 C28.2 D5.2 R17.2 R19.2 | length 356.8
  Top Layer w10: R19.2 C28.2 v1(171.57,380) 171.57,354.25 R17.2
  Top Layer w25: C27.2 D5.2
  Bottom Layer w10: v1(171.57,380) 320,380 365,425 v1(370,425)
NetC28_1: C28.1 R19.1 R20.2 U6.3 | length 146.1
  Top Layer w10: R20.2 180,473.46 R19.1 215,438.46 215,372.91 U6.3
NetC29_2: C29.2 C30.1 D1.2 D2.1 | length 233.5
  Top Layer w25: D1.2 D2.1 C29.2 C30.1
NetC30_2: C30.2 C31.1 D3.2 D4.1 | length 233.5
  Top Layer w25: D3.2 D4.1 C30.2 C31.1
NetC31_2: C31.2 C32.1 D6.2 D7.1 | length 240.6
  Top Layer w25: D6.2 D7.1 C31.2 C32.1 C32.1@515,985
NetC32_2: C32.2 D8.2 D9.1 | length 145.6
  Top Layer w25: D8.2 D9.1 505,1060 C32.2@510,1055
NetC33_2: C33.2 C34.1 D2.2 D3.1 | length 227.1
  Top Layer w25: D2.2 C33.2 C34.1 D3.1
NetC34_2: C34.2 C35.1 D4.2 D6.1 | length 227.1
  Top Layer w25: D4.2 C34.2 C35.1 D6.1
NetC35_2: C35.2 C36.1 D7.2 D8.1 | length 227.1
  Top Layer w25: D7.2 C35.2 C36.1 D8.1
NetC36_2: C36.2 D9.2 R18.2 R24.2 | length 191.2
  Top Layer w25: R18.2 343.54,1050 D9.2 ; D9.2@360,1066.46 R24.2
NetC37_2: C37.2 R22.2 R24.1 | length 108.5
  Top Layer w25: C37.2 319.68,1159.68 R24.1 R22.2
NetC39_2: C39.2 R16.1 R25.2 | length 100
  Top Layer w10: R16.1 C39.2@314.68,1909.68 ; R25.2 270,1950 295,1925
NetC41_2: C41.2 R26.1 R27.2 | length 54.7
  Top Layer w10: R26.1 C41.2@-325.32,1769.68 ; R27.2 -330,1805
NetC42_2: C42.2 R27.1 R28.2 | length 54.7
  Top Layer w10: R27.1 C42.2@-325.32,1844.68 ; R28.2 -330,1880
NetC43_2: C43.2 R28.1 R29.2 | length 54.7
  Top Layer w10: R28.1 C43.2@-325.32,1919.68 ; R29.2 -330,1955
NetC47_1: C47.1 R31.1 | length 95
  Top Layer w15: C47.1 R31.1@3.43,2375
NetC47_2: C47.2 Q1.1 R32.2 | length 270.7
  Top Layer w15: C47.2 -301.26,2362.17 Q1.1 -295.91,2258.43 R32.2
NetC48_1: C48.1 Q1.2 R30.2 | length 86
  Top Layer w25: C48.1 -262.2,2122.17 -262.2,2166.77 Q1.2
NetC49_1: C49.1 R33.1 | length 85
  Top Layer w15: R33.1 C49.1@280,2373.43
NetC49_2: C49.2 Q2.1 R34.2 | length 266.1
  Top Layer w15: Q2.1 R34.2@466.1,2227.32 ; R34.2 C49.2@480,2373.43
NetC50_1: C50.1 Q2.2 R35.2 | length 79.1
  Top Layer w15: Q2.2 395,2140.28 C50.1 395.31,2100 R35.2
NetC52_2: C52.2 U2.5 X1.1 | length 98.6
  Top Layer w8: C52.2 -457.62,577.63 U2.5
NetC53_2: C53.2 U2.6 X1.3 | length 210.1
  Top Layer w8: C53.2 -535.14,494.6 X1.3 -530.14,549.6 -455.14,549.6 -446.8,557.94 U2.6
NetD10_2: D10.2 R22.1 R23.2 | length 160.3
  Top Layer w25: R22.1 R23.2
NetLED3_1: LED3.1 U2.28 | length 341.8
  Top Layer w6: U2.28 -110.85,498.89 -85.14,524.6 -85.14,569.6 -77.74,577 -22,577 -5,560 -5,463.72 LED3.1
NetLED3_2: LED3.2 R6.1 | length 51.3
  Top Layer w10: R6.1 LED3.2
NetR2_1: R2.1 U2.2 U3.32 | length 808.5
  Top Layer w8: R2.1 v1(-512.14,669.91) -480.46,669.91 -447.23,636.68 U2.2 ; U3.32 -231.4,1076.94 v1(-231.4,990.14)
  Bottom Layer w8: v1(-512.14,669.91) -565,722.77 -565,800 -374.86,990.14 v1(-231.4,990.14)
NetR3_1: R3.1 U2.3 U3.31 | length 831.6
  Top Layer w8: v1(-580.83,669.91) R3.1 -565.14,668.77 -546.28,649.91 -485.46,649.91 -452.54,617 U2.3 ; v1(-252.4,1011.14) -251.19,1012.35 U3.31
  Bottom Layer w8: v1(-580.83,669.91) -580.83,804.17 -373.86,1011.14 v1(-252.4,1011.14)
NetR13_1: R13.1 U3.29 | length 46.6
  Top Layer w8: R13.1 U3.29@-290.87,1111.4
NetR13_2: R13.2 U3.28 | length 46.6
  Top Layer w8: R13.2 U3.28@-310.56,1111.4
NetR13_3: R13.3 U3.27 | length 46.6
  Top Layer w8: R13.3 U3.27@-330.24,1111.4
NetR13_4: R13.4 U3.26 | length 46.6
  Top Layer w8: R13.4 U3.26@-349.93,1111.4
NetR13_5: R13.5 U2.41 | length 380.5
  Top Layer w6: R13.5 -346.93,1022.46 -346.93,963.41 -255.93,872.41 U2.41
NetR13_6: R13.6 U2.40 | length 380.5
  Top Layer w6: R13.6 -327.24,1022.46 -327.24,971.57 -236.24,880.57 U2.40
NetR13_7: R13.7 U2.39 | length 380.5
  Top Layer w6: R13.7 -307.56,1022.46 -307.56,979.72 -216.56,888.72 U2.39
NetR15_1: R15.1 U2.20 | length 42.8
  Top Layer w10: R15.1@-255.93,369.5 U2.20
NetR21_1: R21.1 SW3.2 | length 63.3
  Top Layer w6: R21.1@14.54,779.6 35.92,758.22 SW3.2
NetR102_1: R102.1 Y1.1 | length 56.9
  Top Layer w15: Y1.1 41.35,946.66 R102.1
NetU3_2: U3.2 Y1.3 | length 233.6
  Top Layer w6: U3.2 -201.98,1160.83 -145.83,1160.83 -130,1145 v1(-130,1045)
  Bottom Layer w6: v1(-130,1045) v1(-75,1045)
PA9: U2.30
PA10: U2.31
PA11: D-.1 U2.32 USB2.2 | length 990
  Top Layer w8: U2.32 -102.37,577.63 -90,590 v1(0,590) ; D-.1 -20.59,-140.87 USB2.2
  Bottom Layer w8: D-.1 -36.6,-111.6 0,-75 v1(0,590)
PA12: D+.1 U2.33 USB2.3 | length 1039
  Top Layer w8: U2.33 -112.69,597.31 -105,605 -40,605 -25,620 v1(20,620) ; USB2.3 5,-161.74 D+.1
  Bottom Layer w8: v1(20,620) 20,-76.46 D+.1
PA13: P2.3 pad.8 U2.34 | length 782.9
  Top Layer w8: P2.3 -350,235 v1(-345,230) pad.8 ; U2.34 -118,617 -110,625 v1(-60,625)
  Bottom Layer w8: v1(-345,230) -250,230 -70,410 -70,615 v1(-60,625)
PA14: P2.2 pad.0 U2.37 | length 850.7
  Top Layer w6: P2.2 pad.0@-324.41,260.59 ; pad.0@-300,265 v1(-185,265) ; U2.37 v1(-177.19,722.81)
  Bottom Layer w6: v1(-185,265) -185,275 -40,420 -40,640 -122.81,722.81 v1(-177.19,722.81)
PA15: R13.8 U2.38 | length 380.5
  Top Layer w6: R13.8 -287.87,1022.46 -287.87,987.87 -196.87,896.87 U2.38
SW: C29.1 D5.1 L1.2 U6.1 | length 332.4
  Top Layer w25: U6.1@309.69,353.62 L1.2 478.62,353.62 493.94,368.94 D5.1 493.94,473.94 C29.1
pads on no net: P2.4 SW3.3 SW3.4 U1.4 U2.4 U2.7 U2.10 U2.11 U2.12 U2.13 U2.14 U2.15 U2.16 U2.17 U2.18 U2.19 U2.21 U2.25 U2.26 U2.29 U2.42 U2.43 U2.45 U2.46 U3.4 U3.6 U3.14 U3.15 U3.16 U3.17 U3.18 U3.19 U3.20 U3.21 U4.4 U7.4 USB2.4

## Polygon pours and split planes (outlines as drawn)
GND on Bottom Layer "GND_L02_P008" (solid, remove dead copper, pour order 8): -606.28,770 605,770 605,-56.22 236.22,-425 -236.22,-425 -236.22,-408.78 -620,-25
GND on Top Layer "GND_L01_P012" (solid, remove dead copper, pour order 12): 679.68,1574.8 ccw(c590.55,1574.8) 590.55,1663.93 ccw(c590.55,1574.8) 501.42,1574.8 ccw(c590.55,1574.8) 590.55,1485.68 ccw(c590.55,1574.8)
GND on Top Layer "GND_L01_P010" (solid, remove dead copper, pour order 10): -679.68,1574.8 ccw(c-590.55,1574.8) -590.55,1485.68 ccw(c-590.55,1574.8) -501.42,1574.8 ccw(c-590.55,1574.8) -590.55,1663.93 ccw(c-590.55,1574.8)

## Keep-outs
Keep-Out Layer:
  lines w6: 623.18,1535.05 590.55,0 236.22,0 236.22,-425 -236.22,-425 -236.22,0 -590.55,0 -623.18,1535.05 ccw(c-590.55,1574.8) -624.5,1613.44 -649.61,2755.91 649.61,2755.91 624.5,1613.44 ccw(c590.55,1574.8) 623.53,1535.34

## Silkscreen, mask and mechanical layers (free items; w line width, h text height)
Top Overlay:
  text "CLK" at -250,245 h39.37
  text "DIO" at -245,170 h39.37
Top Solder:
  lines w35.43: -600.32,1496.67 ccw(c-590.55,1574.8) -600.32,1652.94 ; 600.32,1496.67 cw(c590.55,1574.8) 600.32,1652.94

## Text inside footprints (layer, text, board x,y; h text height)
R13: Mechanical 1 "R1" at -328.25,1038.06 h11.81
U3: Top Overlay "*" at -182.29,1121.56 h39.37 r180